# Altium PCB FEU-102-1_part1.PcbDoc
Units mm, origin at the board's own origin, x right, y up, seen from the top; angles counter-clockwise.
Board outline 20 x 20 mm, 2 copper layers (Top Layer, Bottom Layer), stack 1.021 mm thick; 25 components, 14 nets, 62 pads, 0 vias.
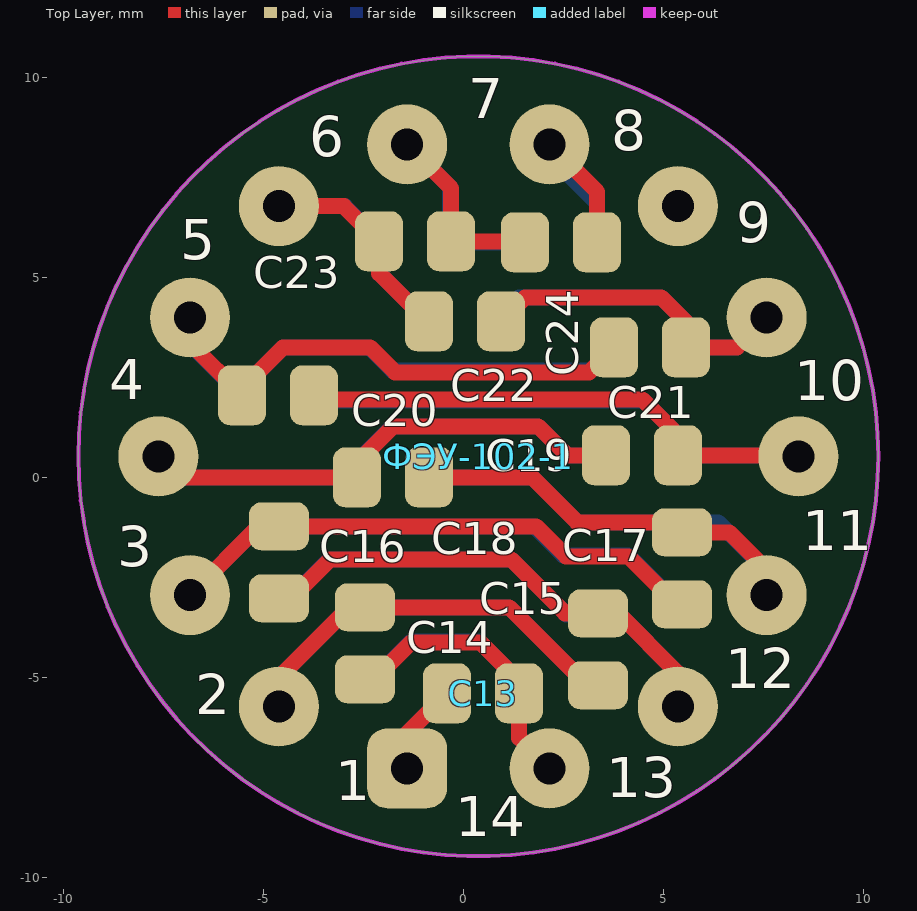
[diagram p0: Top Layer view]
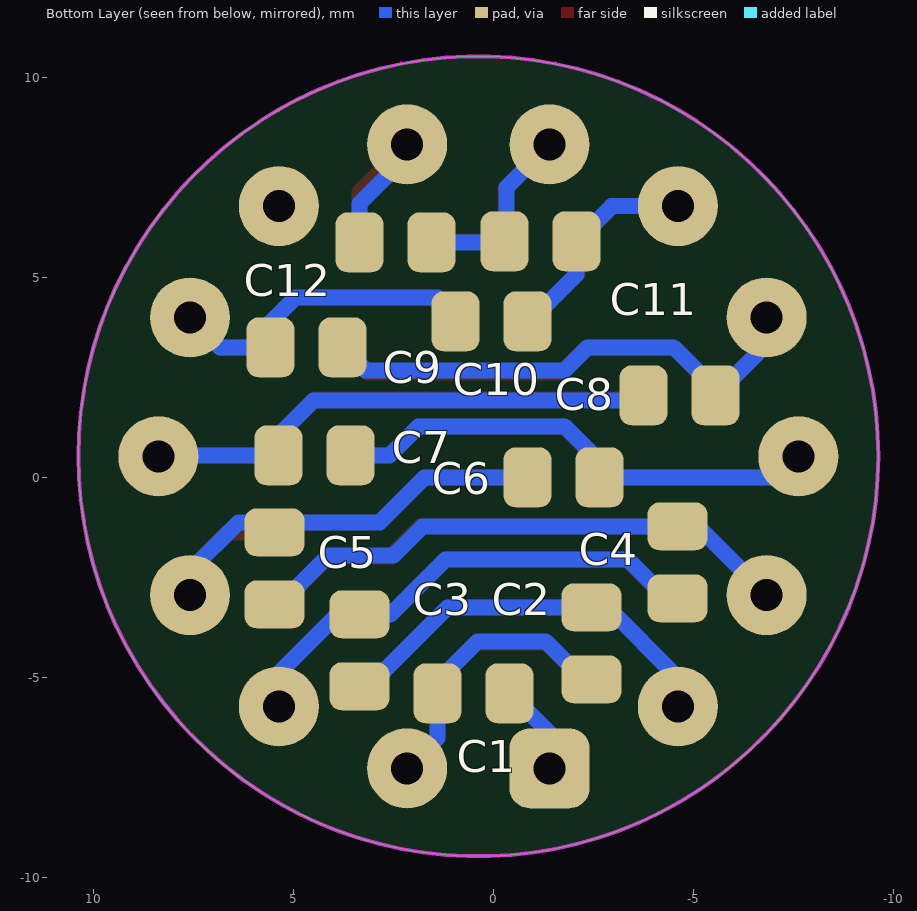
[diagram p1: Bottom Layer view, seen from below]

## Layer stack, top to bottom
Top Solder: solder mask 0.0102, Solder Resist, Dk 3.5
Top Layer: signal copper 0.0356
Dielectric1: dielectric 0.95, FR-4, Dk 4.8
Bottom Layer: signal copper 0.0356
Bottom Solder: solder mask 0.0102, Solder Resist, Dk 3.5

## Board outline
-9.62,0.526 ccw(c0.38,0.526) 0.38,-9.474 ccw(c0.38,0.526) 10.38,0.526 ccw(c0.38,0.526) 0.38,10.526 ccw(c0.38,0.526)

## Design rules (kind name [scope] priority, off if disabled: settings)
Clearance [All] p1: gap=0.25
ComponentClearance [All] p1: gap=0.1 collisioncheckmode=3 verticalgap=0.254 showdistances=TRUE
HoleSize [All] p1: absolutevalues=TRUE maxlimit=2.54 minlimit=0.3 maxpercent=80.000 minpercent=20.000
HoleToHoleClearance [All] p1: gap=0.152 allowstackedmicrovias=TRUE
MinimumAnnularRing [All] p1: minimumring=0.2
MinimumSolderMaskSliver [All] p1: minsoldermaskwidth=0.152
PlaneClearance [All] p1: clearance=2
PlaneConnect [All] p1: planeconnectstyle=Relief reliefexpansion=0.457 reliefentries=4 reliefconductorwidth=0.3 reliefairgap=0.457
PolygonConnect PolygonConnect_via [IsVia] p1: connectstyle=Direct reliefconductorwidth=0.254 reliefentries=4 polygonreliefangle="90 Angle" airgapwidth=0.254
PolygonConnect [All] p2: connectstyle=Relief reliefconductorwidth=0.254 reliefentries=4 polygonreliefangle="90 Angle" airgapwidth=0.254
RoutingVias [All] p1: holewidth=0.3 width=0.62 viastyle="Through Hole" minholewidth=0.3 minwidth=0.62 maxholewidth=6 maxwidth=4
SilkToSilkClearance [All] p1: silktosilkclearance=0.152
SilkToSolderMaskClearance SilkscreenOverComponentPads [IsPad] p1: minsilkscreentomaskgap=0.1 clearancetoexposedcopper=TRUE
SolderMaskExpansion [All] p1: expansion=0.1
Width [All] p1: maxlimit=2.254 minlimit=0.4 preferedwidth=0.4
22 further rules are at their usual default settings.

## Components (designator, comment, footprint, x,y, rotation, side; value= is the part's Value field where it differs from the comment)
C1 "47nF" 0805_CAP 0.5,-5.4 r180 bottom
C2 "47nF" 0805_CAP -2.45,-4.15 r270 bottom
C3 "47nF" 0805_CAP 3.35,-4.325 r270 bottom
C4 "47nF" 0805_CAP -4.6,-2.125 r270 bottom
C5 "47nF" 0805_CAP 5.475,-2.275 r270 bottom
C6 "47nF" 0805_CAP -1.75,0 r0 bottom
C7 "47nF" 0805_CAP 4.475,0.55 r180 bottom
C8 "47nF" 0805_CAP -4.65,2.05 r0 bottom
C9 "47nF" 0805_CAP 4.675,3.25 r180 bottom
C10 "47nF" 0805_CAP 0.05,3.9 r0 bottom
C11 "47nF" 0805_CAP -1.175,5.9 r180 bottom
C12 "47nF" 0805_CAP 2.45,5.875 r180 bottom
C13 "47nF" 0805_CAP 0.5,-5.4 r180 top
C14 "47nF" 0805_CAP -2.45,-4.15 r270 top
C15 "47nF" 0805_CAP 3.375,-4.3 r270 top
C16 "47nF" 0805_CAP -4.6,-2.125 r270 top
C17 "47nF" 0805_CAP 5.475,-2.275 r270 top
C18 "47nF" 0805_CAP -1.75,0 r0 top
C19 "47nF" 0805_CAP 4.475,0.55 r180 top
C20 "47nF" 0805_CAP -4.625,2.05 r0 top
C21 "47nF" 0805_CAP 4.675,3.25 r180 top
C22 "47nF" 0805_CAP 0.05,3.9 r0 top
C23 "47nF" 0805_CAP -1.2,5.9 r180 top
C24 "47nF" 0805_CAP 2.45,5.875 r180 top
ФЭУ-102-1 "Header 7X2" ФЭУ-102 0.38,0.526 r0 top locked

## Footprints (in the part's own frame and the unit in brackets; to place one, negate y for a bottom-side part, rotate by r counter-clockwise, add the part's x,y. Pads: shape width x height; smd on the part's side, far side on the other; paste and mask are expansions set on the pad)
0805_CAP [mm]
  rrect50% 1.2x1.5 smd: 1(-0.9,0) 2(0.9,0)
  body extent -1.11,-0.72 1.1,0.72, height 0.94
ФЭУ-102 [mm]
  rrect50% 2x2 hole 0.8: 1(-1.78,-7.799)
  round 2 hole 0.8: 2(-4.988,-6.255) 3(-7.208,-3.471) 4(-8,0) 5(-7.208,3.471) 6(-4.988,6.255) 7(-1.78,7.799) 8(1.78,7.799) 9(4.988,6.255) 10(7.208,3.471) 11(8,0) 12(7.208,-3.471) 13(4.988,-6.255) 14(1.78,-7.799)
  Keep-Out Layer circle w0.1: c0,0 r10

## Part data
C1 C2 C3 C4 C5 C6 C7 C8 C9 C10 C11 C12 C13 C14 C15 C16 C17 C18 C19 C20 C21 C22 C23 C24: library part "Cap Semi", "Capacitor (Semiconductor SIM Model)"
ФЭУ-102-1: "Header, 7-Pin, Dual row"

## Nets (pads, with @x,y where several pads share a name; then routed paths per layer and width w, separated by ;. In a path a pad name is that pad's centre, name@x,y a point inside that pad or via, vN(x,y) a via of type N, cw(c..) or ccw(c..) an arc to the next point about the centre after c; other vN are vias at no path point)
ANODE: ФЭУ-102-1.9
DINODE1: C1.1 C2.2 C13.1 C14.2 ФЭУ-102-1.14 | length 14.3
  Top Layer w0.4: C14.2 -2.225,-5.05 -1.3,-4.125 0.425,-4.125 1.4,-5.1 C13.1 1.4,-6.514 ФЭУ-102-1.14
  Bottom Layer w0.4: C2.2 -2.25,-5.05 -1.3,-4.1 0.4,-4.1 1.4,-5.1 C1.1 1.4,-6.514 ФЭУ-102-1.14
DINODE2: C2.1 C3.2 C14.1 C15.2 ФЭУ-102-1.2 | length 20.5
  Top Layer w0.4: ФЭУ-102-1.2 -4.608,-5.008 -2.85,-3.25 C14.1 1.15,-3.25 3.1,-5.2 C15.2
  Bottom Layer w0.4: ФЭУ-102-1.2 -4.608,-5.008 -2.85,-3.25 C2.1 1.15,-3.25 3.125,-5.225 C3.2
DINODE3: C3.1 C4.2 C15.1 C16.2 ФЭУ-102-1.13 | length 24.9
  Top Layer w0.4: C16.2 -4.3,-3.025 -3.325,-2.05 1.2,-2.05 2.55,-3.4 C15.1 3.875,-3.4 5.368,-4.893 ФЭУ-102-1.13
  Bottom Layer w0.4: C4.2@-4.7,-3.025 C4.2 -4.325,-3.025 -3.35,-2.05 1.2,-2.05 2.575,-3.425 C3.1 3.9,-3.425 5.368,-4.893 ФЭУ-102-1.13
DINODE4: C4.1 C5.2 C16.1 C17.2 ФЭУ-102-1.3 | length 27.5
  Top Layer w0.4: ФЭУ-102-1.3 -5.107,-1.225 C16.1 1.825,-1.225 2.575,-1.975 4.125,-1.975 5.325,-3.175 C17.2
  Bottom Layer w0.4: ФЭУ-102-1.3 -5.107,-1.225 C4.1 1.775,-1.225 2.5,-1.95 4.125,-1.95 5.1,-2.925 C5.2@5.475,-2.925
DINODE5: C5.1 C6.2 C17.1 C18.2 ФЭУ-102-1.12 | length 20
  Top Layer w0.4: C18.2 1.725,0 2.85,-1.125 5.225,-1.125 C17.1 6.65,-1.375 7.588,-2.313 ФЭУ-102-1.12
  Bottom Layer w0.4: C6.2 1.725,0 2.85,-1.125 6.375,-1.125 7.588,-2.338 ФЭУ-102-1.12
DINODE6: C6.1 C7.2 C18.1 C19.2 ФЭУ-102-1.4 | length 24.8
  Top Layer w0.4: ФЭУ-102-1.4 -7.094,0 C18.1 -2.65,0.375 -1.75,1.275 1.875,1.275 2.6,0.55 C19.2
  Bottom Layer w0.4: ФЭУ-102-1.4 -7.094,0 -2.85,0 -2.85,0.2 -1.775,1.275 1.875,1.275 2.6,0.55 C7.2
DINODE7: C7.1 C8.2 C19.1 C20.2 ФЭУ-102-1.11 | length 26.1
  Top Layer w0.4: C20.2 -3.625,1.95 4.475,1.95 5.375,1.05 C19.1 8.356,0.55 ФЭУ-102-1.11
  Bottom Layer w0.4: C8.2 -3.625,1.925 4.5,1.925 5.375,1.05 C7.1 8.356,0.55 ФЭУ-102-1.11
DINODE8: C8.1 C9.2 C20.1 C21.2 ФЭУ-102-1.5 | length 25.8
  Top Layer w0.4: ФЭУ-102-1.5 -6.828,3.353 C20.1 -5.525,2.225 -4.5,3.25 -2.325,3.25 -1.7,2.625 3.15,2.625 C21.2
  Bottom Layer w0.4: ФЭУ-102-1.5 -6.828,3.328 C8.1 -5.55,2.2 -4.5,3.25 -2.35,3.25 -1.775,2.675 3.2,2.675 C9.2
DINODE9: C9.1 C10.2 C21.1 C22.2 ФЭУ-102-1.10 | length 16.2
  Top Layer w0.4: C22.2 1.55,4.5 4.95,4.5 5.575,3.875 C21.1 6.841,3.25 ФЭУ-102-1.10
  Bottom Layer w0.4: C10.2@0.85,3.95 1.4,4.5 4.95,4.5 5.575,3.875 C9.1 6.841,3.25 ФЭУ-102-1.10
DINODE10: C10.1 C11.2 C22.1 C23.2 ФЭУ-102-1.6 | length 10.8
  Top Layer w0.4: ФЭУ-102-1.6 -2.98,6.78 C23.2 -2.1,5.1 -0.9,3.9 C22.1
  Bottom Layer w0.4: ФЭУ-102-1.6@-4.608,6.733 ФЭУ-102-1.6 -2.955,6.78 C11.2 -2.075,5.075 C10.1@-0.95,3.95
DINODE11: C11.1 C12.2 C23.1 C24.2 ФЭУ-102-1.7 | length 9.5
  Top Layer w0.4: ФЭУ-102-1.7 -0.3,7.225 C23.1 1.525,5.9 C24.2
  Bottom Layer w0.4: ФЭУ-102-1.7 -0.325,7.25 -0.325,5.95 C11.1 -0.25,5.875 C12.2
DINODE12: C12.1 C24.1 ФЭУ-102-1.8 | length 5.9
  Top Layer w0.4: ФЭУ-102-1.8 3.35,7.135 C24.1
  Bottom Layer w0.4: ФЭУ-102-1.8 2.16,8.04 3.35,6.85 C12.1
FOTOKAT: C1.2 C13.2 ФЭУ-102-1.1 | length 4.6
  Top Layer w0.4: ФЭУ-102-1.1 -1.4,-6.4 C13.2
  Bottom Layer w0.4: ФЭУ-102-1.1 -1.4,-6.4 C1.2

## Silkscreen, mask and mechanical layers (free items; w line width, h text height)
Top Overlay:
  text "7" at 0.125,8.975 h1
  text "8" at 3.7,8.175 h1
  text "6" at -3.85,8.025 h1
  text "9" at 6.825,5.875 h1
  text "5" at -7.075,5.45 h1
  text "4" at -8.85,1.95 h1
  text "10" at 8.275,1.925 h1
  text "11" at 8.475,-1.825 h1
  text "3" at -8.65,-2.225 h1
  text "12" at 6.55,-5.275 h1
  text "2" at -6.7,-5.925 h1
  text "13" at 3.575,-8 h1
  text "1" at -3.2,-8.075 h1
  text "14" at -0.2,-8.975 h1